# Altium PCB gps.PcbDoc
Units mm, origin at the board's own origin, x right, y up, seen from the top; angles counter-clockwise.
Board outline 152.4 x 101.6 mm, 4 copper layers (F.Cu, In1.Cu, In2.Cu, B.Cu); 9 components, 117 nets, 38 pads, 0 vias.
Unrouted connection lines stored in the file: 20.
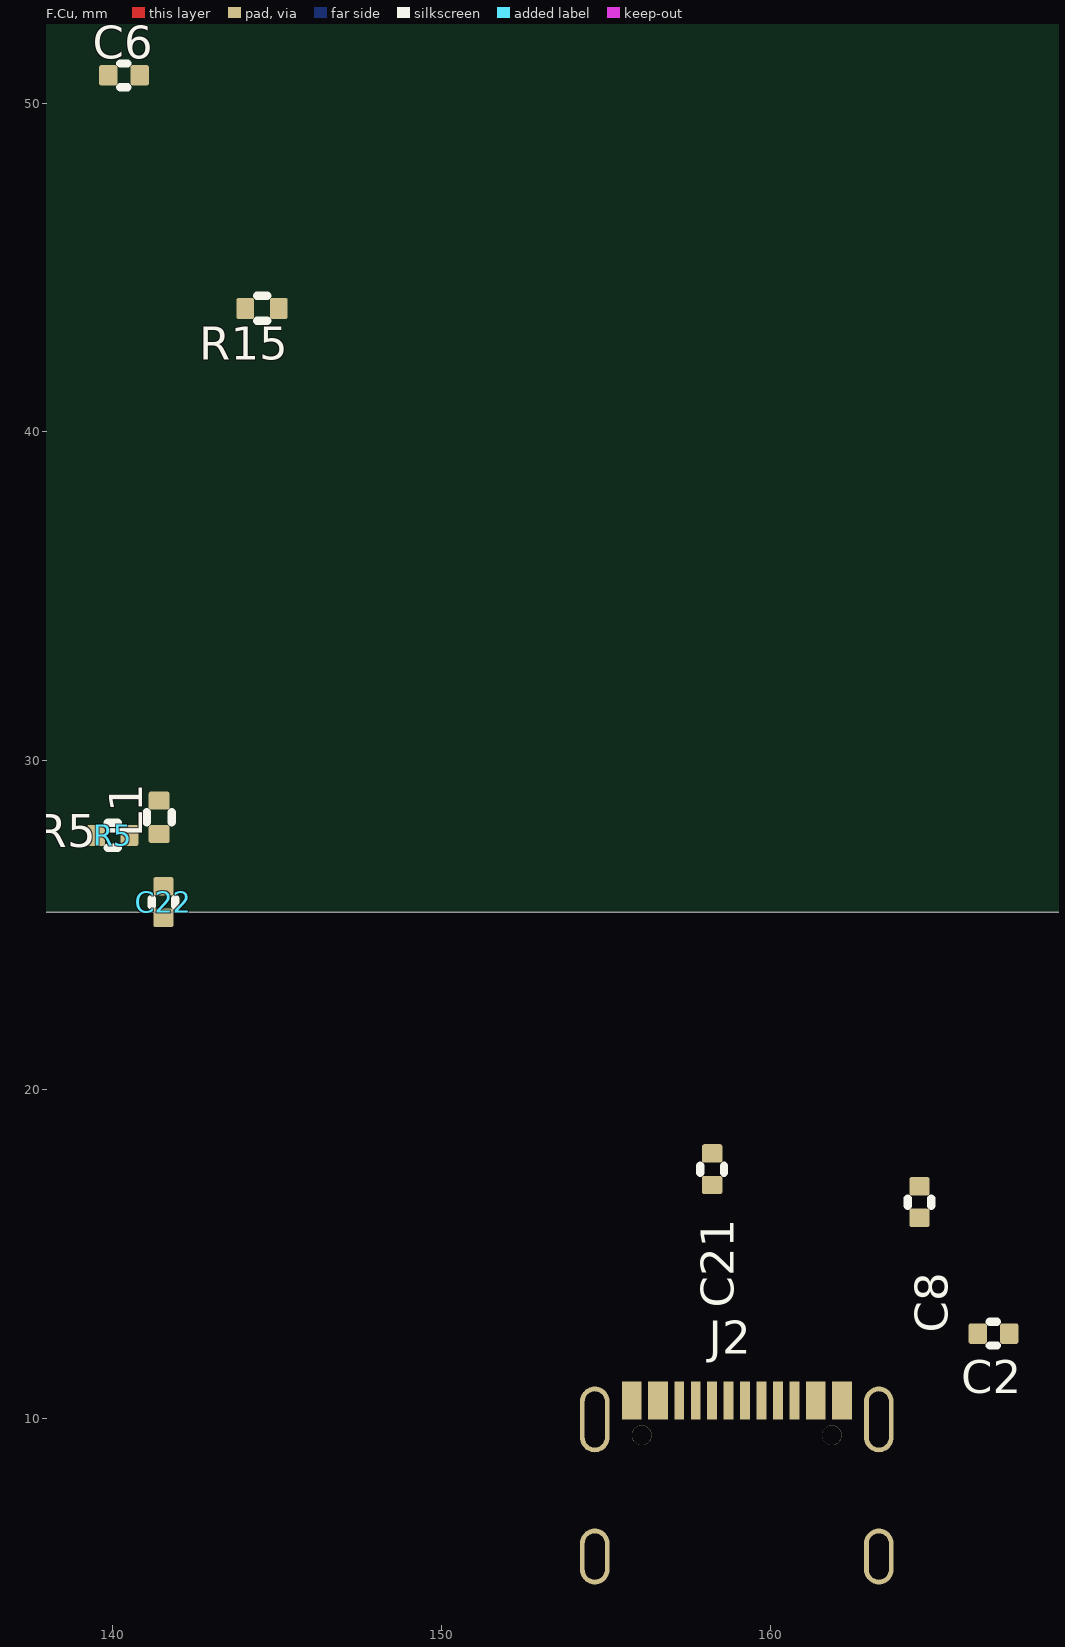
[diagram p0: F.Cu view]
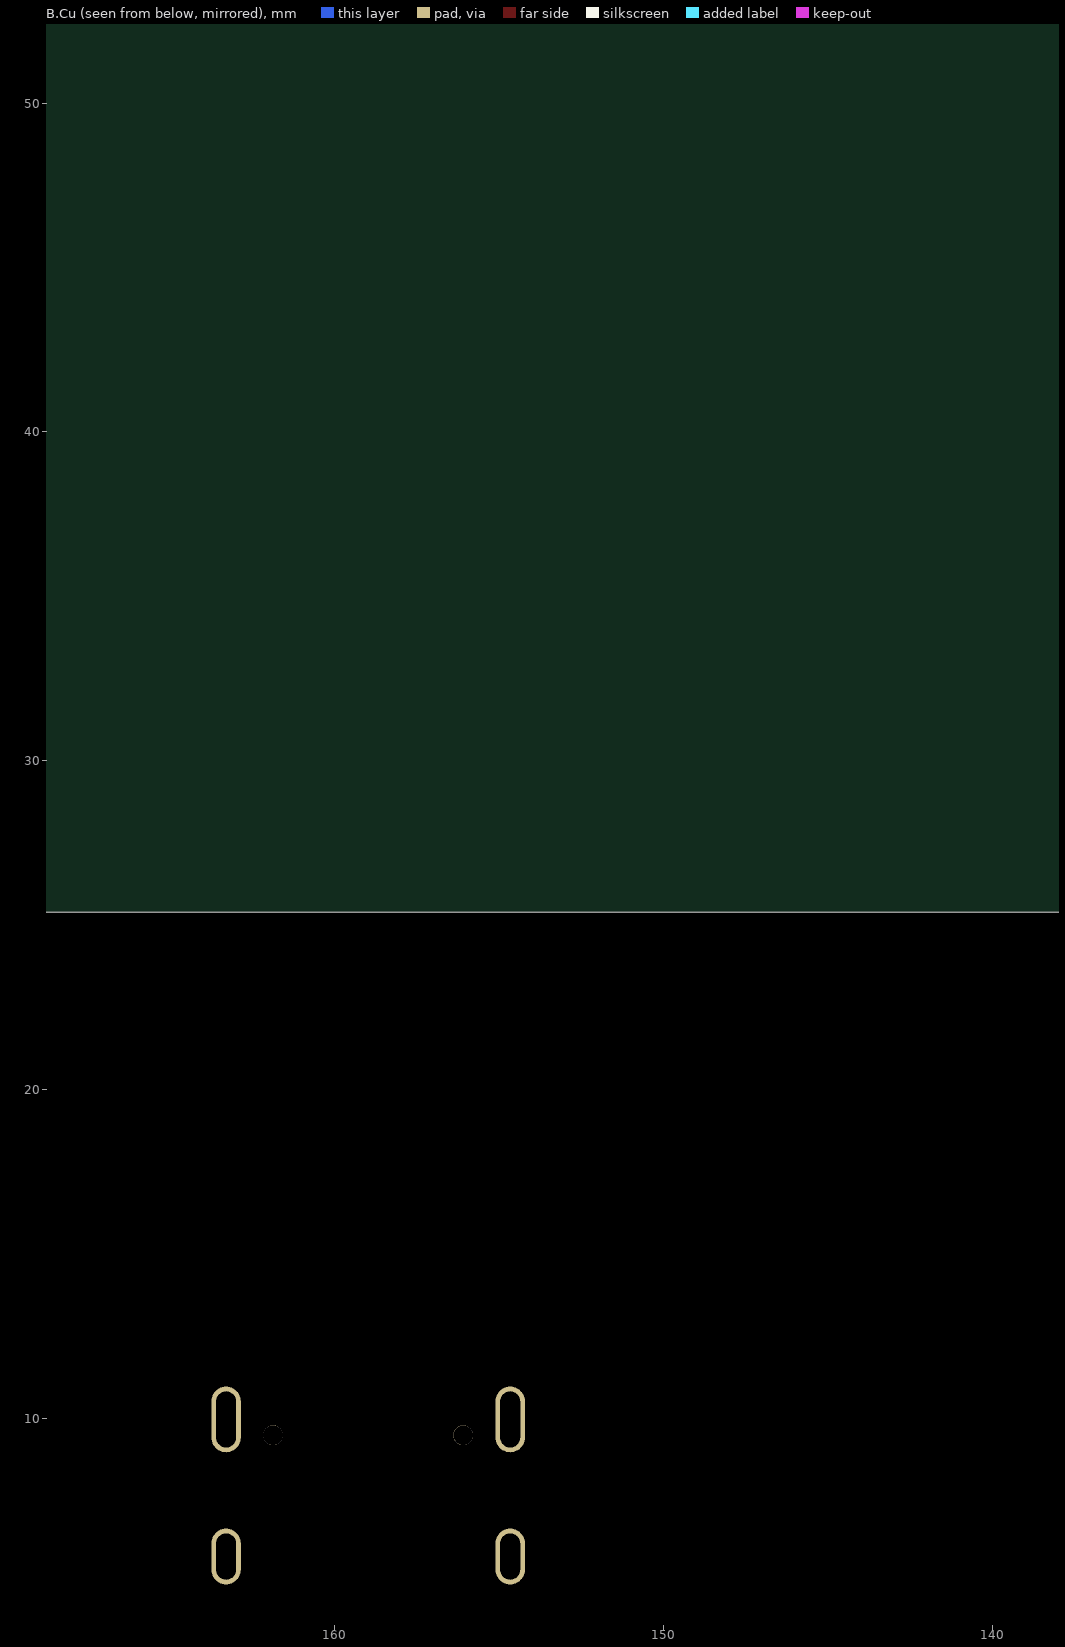
[diagram p1: B.Cu view, seen from below]

## Layer stack, top to bottom
F.Mask: solder mask 0.0102, Solder Resist, Dk 3.5
F.Cu: signal copper 0.0356
Dielectric 1: dielectric 0.32, FR-4, Dk 4.8
In1.Cu: signal copper 0.0356
Dielectric2: dielectric 0.32, FR-4, Dk 4.8
In2.Cu: signal copper 0.0356
Dielectric3: dielectric 0.32, FR-4, Dk 4.8
B.Cu: signal copper 0.0356
B.Mask: solder mask 0.0102, Solder Resist, Dk 3.5

## Board outline
25.4,25.4 177.8,25.4 177.8,127 25.4,127

## Design rules (kind name [scope] priority, off if disabled: settings)
RoutingVias [All] p1: holewidth=0.711 width=1.27 viastyle="Through Hole" minholewidth=0.711 minwidth=1.27 maxholewidth=0.711 maxwidth=1.27
SolderMaskExpansion [All] p1: expansion=0.102 istentingtop=FALSE
29 further rules are at their usual default settings.

## Components (designator, comment, footprint, x,y, rotation, side; value= is the part's Value field where it differs from the comment)
C2 "Comment" C_0402_1005Metric 166.793,12.577 r180 top value=100n
C6 "Comment" C_0402_1005Metric 140.349,50.845 r0 top value=100n
C8 "Comment" C_0402_1005Metric 164.543,16.577 r270 top value=100n
C21 "Comment" C_0402_1005Metric 158.237,17.578 r270 top value=100n
C22 "Comment" C_0402_1005Metric 141.55,25.7 r270 top value=100n
J2 "Comment" USB_C_Receptacle_Palconn_UTC16-G 158.988,8.039 r0 top value=USB_C_Receptacle_USB2.0_16P
L1 "Comment" R_0402_1005Metric 141.42,28.28 r90 top value="27n >300mA"
R5 "Comment" R_0402_1005Metric 140.01,27.73 r180 top value=100R
R15 "Comment" R_0402_1005Metric 144.549,43.758 r180 top value=10k

## Footprints (in the part's own frame and the unit in brackets; to place one, negate y for a bottom-side part, rotate by r counter-clockwise, add the part's x,y. Pads: shape width x height; smd on the part's side, far side on the other; paste and mask are expansions set on the pad)
C_0402_1005Metric [mm]
  rrect25% 0.56x0.62 smd mask+0: 1(-0.48,0) 2(0.48,0)
  silkscreen extent -0.11,-0.36 0.11,0.36
R_0402_1005Metric [mm]
  rrect25% 0.54x0.64 smd mask+0: 1(-0.51,0) 2(0.51,0)
  silkscreen extent -0.15,-0.38 0.15,0.38
USB_C_Receptacle_Palconn_UTC16-G [mm]
  rect 0.6x1.16 smd mask+0: A1(-3.2,2.51) A4(-2.4,2.51) A4(-2.4,2.51) A9(2.4,2.51) A9(2.4,2.51) A12(3.2,2.51) B1(3.2,2.51) B12(-3.2,2.51)
  rect 0.3x1.16 smd mask+0: A5(-1.25,2.51) A6(-0.25,2.51) A7(0.25,2.51) A8(1.25,2.51) B5(1.75,2.51) B6(0.75,2.51) B7(-0.75,2.51) B8(-1.75,2.51)
  rrect100% 0.9x1.7 hole 0.6 slot 1.4 at 90 deg paste-1.7 mask+0: S1(-4.32,-2.24) S1(4.32,-2.24)
  rrect100% 0.9x2 hole 0.6 slot 1.7 at 90 deg paste-2 mask+0: S1(-4.32,1.93) S1(4.32,1.93)
  round 0.6 hole 0.6 paste-0.6 mask+0: Un1(-2.89,1.45) Un2(2.89,1.45)

## Part data
C2 C6 C8 C21 C22: library part C_0402_1005Metric, "Capacitor SMD 0402 (1005 Metric), square (rectangular) end terminal, IPC_7351 nominal, (Body size source: IPC-SM-782 page 76, https://www.pcb-3d.com/wordpress/wp-content/uploads/ipc-sm-782a_amendment_1_and_2.pdf), generated with kicad-footprint-generator", LCSC Part #=C307331, Footprint=Capacitor_SMD:C_0402_1005Metric, basic?=yes, info="100nF Cap", Price=C$0.0077, JLC Link=https://jlcpcb.com/partdetail/291005-CL05B104KB54PNC/C307331, ki_fp_filters=C_*
  C6: Description="Unpolarized capacitor"
J2: library part USB_C_Receptacle_Palconn_UTC16-G, "http://www.palpilot.com/wp-content/uploads/2017/05/UTC027-GKN-OR-Rev-A.pdf", LCSC Part #=C2765186, Footprint=Connector_USB:USB_C_Receptacle_Palconn_UTC16-G, Datasheet=https://www.usb.org/sites/default/files/documents/usb_type-c.zip, Description="USB 2.0-only 16P Type-C Receptacle connector", JLC Link=https://jlcpcb.com/partdetail/ShouHan-TYPE_C_16PIN_2MD_073/C2765186, basic?=no, info=USB-C, Price=C$0.0738, ki_fp_filters=USB*C*Receptacle*
L1: library part R_0402_1005Metric, "Resistor SMD 0402 (1005 Metric), square (rectangular) end terminal, IPC_7351 nominal, (Body size source: IPC-SM-782 page 72, https://www.pcb-3d.com/wordpress/wp-content/uploads/ipc-sm-782a_amendment_1_and_2.pdf), generated with kicad-footprint-generator", LCSC Part #=C12669, Current Draw="Rated current: 350 mA", Manufacturer Name="Murata Electronics", Manufacturer Part Number=LQG15HS27NJ02D, Mouser Part Number=81-LQG15HS27NJ02D, Footprint=Resistor_SMD:R_0402_1005Metric, JLC Link=https://jlcpcb.com/partdetail/MurataElectronics-LQG15HS27NJ02D/C12669, basic?=Yes, info="27 nH ±5%, 0402 SMD inductor, High-Frequency Series (LQG15HS), suitable for RF circuits", Price="~C$0.006 per unit (bulk pricing)", notes="DCR: 0.46 Ω; Self-resonant frequency: ~1.9 GHz; High Q, designed for RF bypass and filtering applications like bias tees", Height="0.5 mm", Mouser Price/Stock="~C$0.16 / In Stock", ki_fp_filters="Choke_* *Coil* Inductor_* L_*"
R5: library part R_0402_1005Metric, "Resistor SMD 0402 (1005 Metric), square (rectangular) end terminal, IPC_7351 nominal, (Body size source: IPC-SM-782 page 72, https://www.pcb-3d.com/wordpress/wp-content/uploads/ipc-sm-782a_amendment_1_and_2.pdf), generated with kicad-footprint-generator", LCSC Part #=C25078, Current Draw="N/A (passive component)", Manufacturer Name="UNI-ROYAL (Uniroyal Elec)", Manufacturer Part Number=0402WGF1000TCE, Mouser Part Number="Not listed", Footprint=Resistor_SMD:R_0402_1005Metric, JLC Link=https://jlcpcb.com/partdetail/25821-0402WGF1000TCE/C25078, basic?=Yes, info="Thick Film Chip Resistor, 100 Ω, 0402 package, ±1% tolerance, ±100 ppm/°C temperature coefficient, 1/16 W (62.5 mW) power rating", Price="Approximately C$0.0005 per unit (bulk pricing available)", notes="Suitable for general-purpose surface-mount applications; RoHS compliant", Height="Approximately 0.4 mm", Mouser Price/Stock="Not listed", ki_fp_filters=R_*
R15: library part R_0402_1005Metric, "Resistor SMD 0402 (1005 Metric), square (rectangular) end terminal, IPC_7351 nominal, (Body size source: IPC-SM-782 page 72, https://www.pcb-3d.com/wordpress/wp-content/uploads/ipc-sm-782a_amendment_1_and_2.pdf), generated with kicad-footprint-generator", LCSC Part #=C25744, Footprint=Resistor_SMD:R_0402_1005Metric, Description=Resistor, JLC Link=https://jlcpcb.com/partdetail/26487-0402WGF1002TCE/C25744, basic?=yes, info="10k ohm", Price=C$0.0007, ki_fp_filters=R_*

## Nets (pads, with @x,y where several pads share a name; then routed paths per layer and width w, separated by ;. In a path a pad name is that pad's centre, name@x,y a point inside that pad or via, vN(x,y) a via of type N, cw(c..) or ccw(c..) an arc to the next point about the centre after c; other vN are vias at no path point)
+1.1V: C8.1
+3.3V: C2.1 C6.1 C21.1 R15.1
+5V: 
BACKUP: 
CANINT: 
CANN: 
CANP: 
CANRESET: R15.2
CANSTBY: 
CS: 
GND: C2.2 C6.2 C8.2 C21.2 C22.2 J2.A1 J2.A12 J2.B1 J2.B12 J2.S1
GPS_USB_D+: 
GPS_USB_D-: 
Net-(C22-Pad1): C22.1 L1.1 R5.1
Net-(D2-PadC): 
Net-(D3-K): 
Net-(D4-K): 
Net-(D5-A): 
Net-(D6-A): 
Net-(J2-CC1): J2.A5
Net-(J2-CC2): J2.B5
Net-(J4-CC1): 
Net-(J4-CC2): 
Net-(PPS_LED1-Pad1): 
Net-(PWR1-Pad1): 
Net-(Q1-D): R5.2
Net-(Q1-G): 
Net-(Q1-S): 
Net-(U5-LNA_EN): 
Net-(U5-VCC_RF): 
Net-(U5-{\R\E\S\E\T\}\)\: 
Net-(U5-{\S\A\F\E\B\O\O\T\}\)\: 
OSC1: 
OSC2: 
PLS: 
QSPI_SCLK: 
QSPI_SD0: 
QSPI_SD1: 
QSPI_SD2: 
QSPI_SD3: 
QSPI_SS: 
RF_ANT: L1.2
RUN: 
rx: 
SCK: 
SI: 
SO: 
SWCLK: 
SWD: 
tx: 
U4_USB_D+: 
U4_USB_D-: 
U5_USB_D+: 
U5_USB_D-: 
unconnected-(J1-+3.3V-PadB8): 
unconnected-(J1-+12V-PadA2): 
unconnected-(J1-GND-PadA15): 
unconnected-(J1-GND-PadA18): 
unconnected-(J1-GND-PadB16): 
unconnected-(J1-GND-PadB18): 
unconnected-(J1-JTAG5-PadA8): 
unconnected-(J1-PERn0-PadA17): 
unconnected-(J1-PERp0-PadA16): 
unconnected-(J1-PETn0-PadB15): 
unconnected-(J1-{\P\R\S\N\T\2\}\-\P\a\d\B\1\7\)\: 
unconnected-(J2-SBU1-PadA8): J2.A8
unconnected-(J2-SBU2-PadB8): J2.B8
unconnected-(J2-VBUS-PadA4): J2.A4
unconnected-(J2-VBUS-PadA4)_2: J2.A9
unconnected-(J4-SBU1-PadA8): 
unconnected-(J4-SBU2-PadB8): 
unconnected-(J4-VBUS-PadA4): 
unconnected-(J4-VBUS-PadA4)_1: 
unconnected-(U3-*RX0BF-Pad24): 
unconnected-(U3-*RX1BF-Pad23): 
unconnected-(U3-*TX0RTS-Pad7): 
unconnected-(U3-*TX1RTS-Pad8): 
unconnected-(U3-*TX2RTS-Pad9): 
unconnected-(U3-CLKOUT-Pad6): 
unconnected-(U3-NC-Pad14): 
unconnected-(U3-NC-Pad17): 
unconnected-(U4-GPIO0-Pad2): 
unconnected-(U4-GPIO1-Pad3): 
unconnected-(U4-GPIO2-Pad4): 
unconnected-(U4-GPIO3-Pad5): 
unconnected-(U4-GPIO4-Pad6): 
unconnected-(U4-GPIO5-Pad7): 
unconnected-(U4-GPIO6-Pad8): 
unconnected-(U4-GPIO7-Pad9): 
unconnected-(U4-GPIO8-Pad11): 
unconnected-(U4-GPIO9-Pad12): 
unconnected-(U4-GPIO10-Pad13): 
unconnected-(U4-GPIO11-Pad14): 
unconnected-(U4-GPIO12-Pad15): 
unconnected-(U4-GPIO13-Pad16): 
unconnected-(U4-GPIO14-Pad17): 
unconnected-(U4-GPIO15-Pad18): 
unconnected-(U4-GPIO18-Pad29): 
unconnected-(U4-GPIO21-Pad32): 
unconnected-(U4-GPIO24-Pad36): 
unconnected-(U4-GPIO25-Pad37): 
unconnected-(U4-GPIO27_ADC1-Pad39): 
unconnected-(U5-D_SEL-Pad2): 
unconnected-(U5-EXTINT-Pad4): 
unconnected-(U5-RESERVED-Pad15): 
unconnected-(U5-RESERVED-Pad16): 
unconnected-(U5-RESERVED-Pad17): 
unconnected-(U5-SCL{slash}SPI_CLK-Pad19): 
unconnected-(U5-SDA{slash}{\S\P\I\_\C\S\}\-\P\a\d\1\8\)\: 
USART4_RX: 
USART4_TX: 
USB_D+: J2.A6 J2.B6
USB_D-: J2.A7 J2.B7
XIN: 
XOUT: 
XOUT_pre: 
{\U\S\B\_\B\O\O\T\_\S\}\: 
pads on no net: J2.Un1 J2.Un2

## Text inside footprints (layer, text, board x,y; h text height)
J2: Dwgs.User "PCB Edge" at 155.541,3.792 h1